# EAGLE board Putri Shaqila_main (EAGLE 9.6.2)
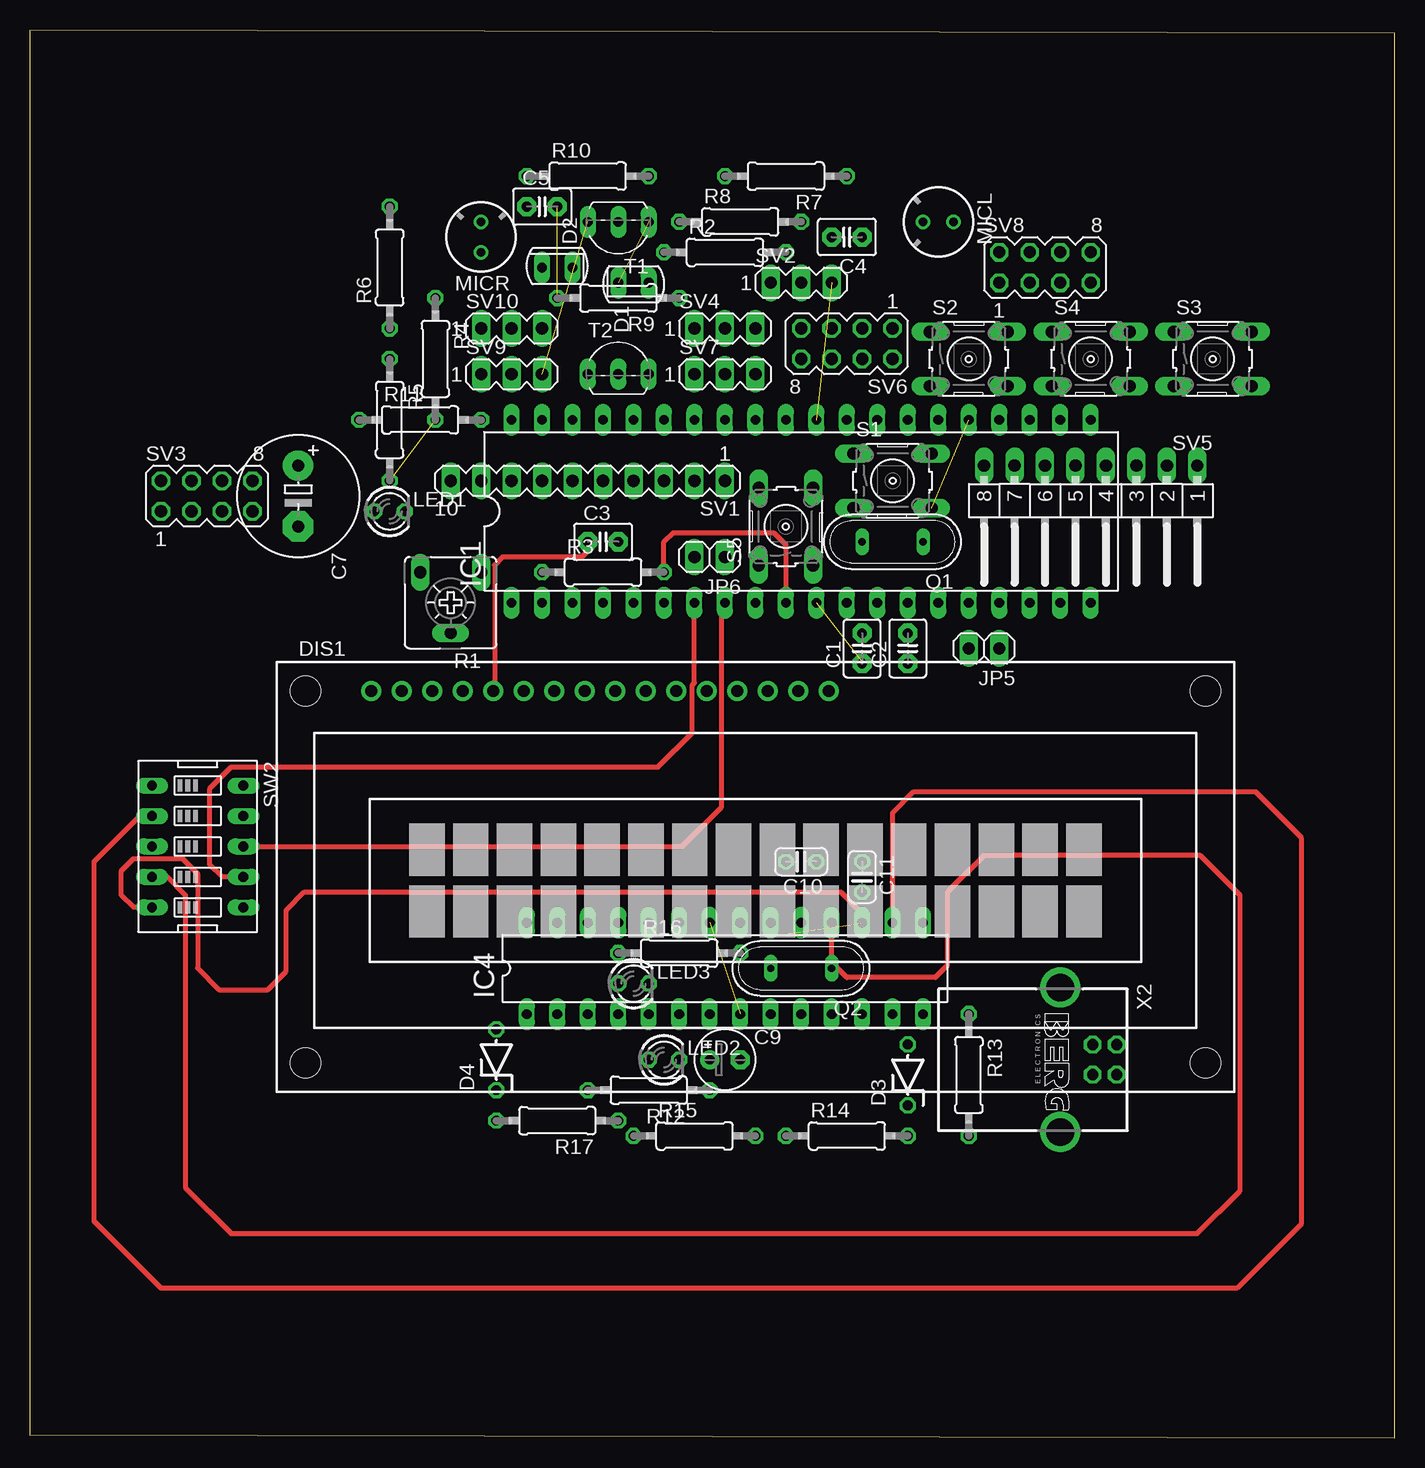
[diagram p0: board, top side]
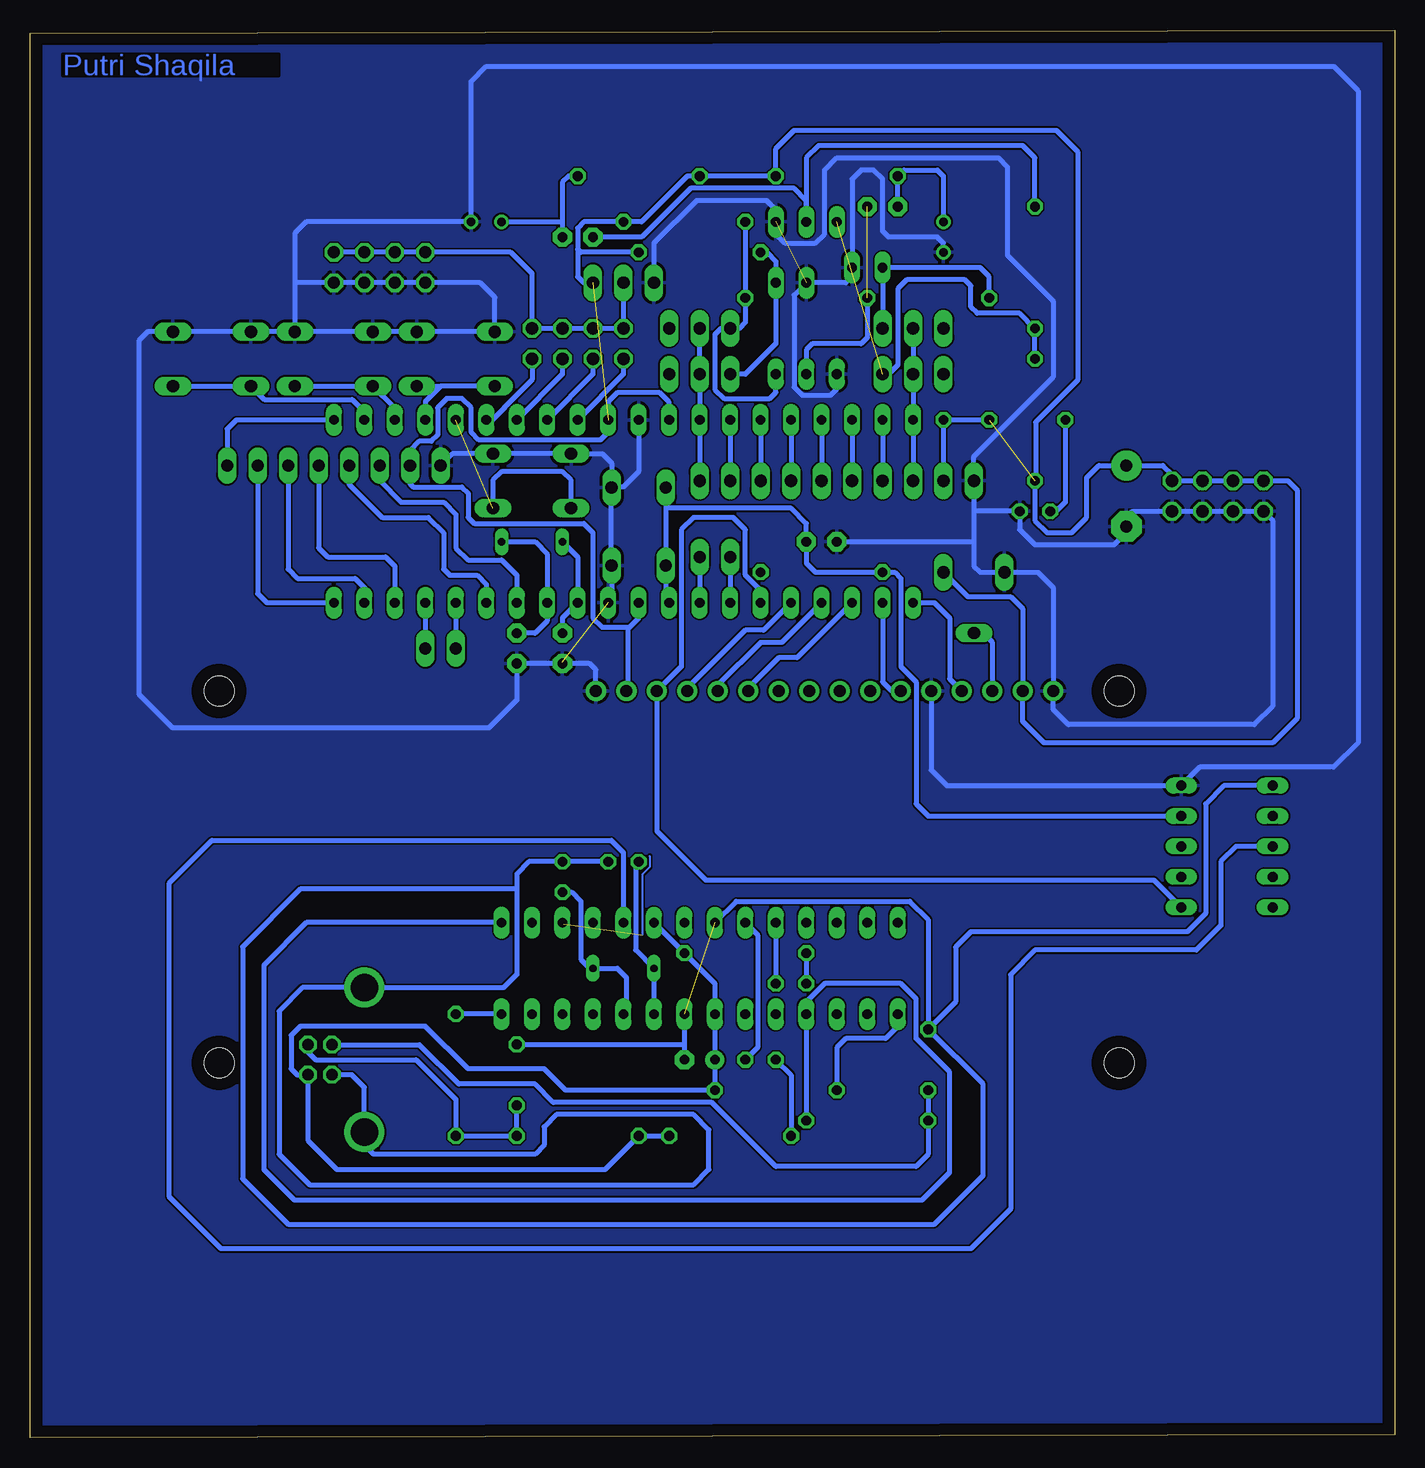
[diagram p1: board, bottom side, seen from below]

Size 113.72 x 117.34 mm. Coordinates in mm from the lower left corner, seen from the top.
Outline: 0,0.25 113.72,0 113.72,117.08 0,117.34 0,0.25
Copper layers (1*16): Top 0.035mm / dielectric 1.5mm / Bottom 0.035mm
Design rules "default": minimum track width 6mil, minimum drill 0.35mm, track to track 6mil, track to pad 6mil, pad to pad 6mil, via to via 6mil, smd to smd 6mil, copper to edge 40mil, drill to drill 6mil, minimum pad ring 10mil, minimum via ring 8mil, stop-mask expansion 4mil, vias tented up to drill 0mil, thermal gap 10mil

## Footprints (pad centres in the part's own frame; a part is rotated, then mirrored left to right if it is on the bottom)
C2.5-3 = drill 0.813 pad 1.6 octagon: 1 -1.27,0; 2 1.27,0
E5-10,5 = drill 1.016 pad 2.54: + -2.54,0 | drill 1.016 pad 2.54 octagon: - 2.54,0
E2,5-5 = drill 0.813 pad 1.6: + -1.27,0 | drill 0.813 pad 1.6 octagon: - 1.27,0
C025-024X044 = drill 0.813 octagon: 1 -1.27,0; 2 1.27,0
SFH225 = drill 0.813 long: A 0,1.27; K 0,-1.27
ZDIO-5 = drill 0.813 octagon: A 2.54,0; C -2.54,0
TUXGR_16X2_R2 = drill 1 pad 1.676: 1 -32,15.5; 2 -29.46,15.5; 3 -26.92,15.5; 4 -24.38,15.5; 5 -21.84,15.5; 6 -19.3,15.5; 7 -16.76,15.5; 8 -14.22,15.5; 9 -11.68,15.5; 10 -9.14,15.5; 11 -6.6,15.5; 12 -4.06,15.5; 13 -1.52,15.5; 14 1.02,15.5; 15 3.56,15.5; 16 6.1,15.5 | hole 2.5: -37.5,-15.5; 37.5,-15.5; -37.5,15.5; 37.5,15.5
DIL40 = drill 0.813 long: 1 -24.13,-7.62; 2 -21.59,-7.62; 3 -19.05,-7.62; 4 -16.51,-7.62; 5 -13.97,-7.62; 6 -11.43,-7.62; 7 -8.89,-7.62; 8 -6.35,-7.62; 9 -3.81,-7.62; 10 -1.27,-7.62; 11 1.27,-7.62; 12 3.81,-7.62; 13 6.35,-7.62; 14 8.89,-7.62; 15 11.43,-7.62; 16 13.97,-7.62; 17 16.51,-7.62; 18 19.05,-7.62; 19 21.59,-7.62; 20 24.13,-7.62; 21 24.13,7.62; 22 21.59,7.62; 23 19.05,7.62; 24 16.51,7.62; 25 13.97,7.62; 26 11.43,7.62; 27 8.89,7.62; 28 6.35,7.62; 29 3.81,7.62; 30 1.27,7.62; 31 -1.27,7.62; 32 -3.81,7.62; 33 -6.35,7.62; 34 -8.89,7.62; 35 -11.43,7.62; 36 -13.97,7.62; 37 -16.51,7.62; 38 -19.05,7.62; 39 -21.59,7.62; 40 -24.13,7.62
DIL28-3 = drill 0.813 long: 1 -16.51,-3.81; 2 -13.97,-3.81; 3 -11.43,-3.81; 4 -8.89,-3.81; 5 -6.35,-3.81; 6 -3.81,-3.81; 7 -1.27,-3.81; 8 1.27,-3.81; 9 3.81,-3.81; 10 6.35,-3.81; 11 8.89,-3.81; 12 11.43,-3.81; 13 13.97,-3.81; 14 16.51,-3.81; 15 16.51,3.81; 16 13.97,3.81; 17 11.43,3.81; 18 8.89,3.81; 19 6.35,3.81; 20 3.81,3.81; 21 1.27,3.81; 22 -1.27,3.81; 23 -3.81,3.81; 24 -6.35,3.81; 25 -8.89,3.81; 26 -11.43,3.81; 27 -13.97,3.81; 28 -16.51,3.81
1X02 = drill 1.016 long: 1 -1.27,0; 2 1.27,0
LED3MM = drill 0.813 octagon: A -1.27,0; K 1.27,0
F6050AP = drill 0.7 pad 1.2: 1 0,1.27; 2 0,-1.27
QS = drill 0.61 long: 1 -2.54,0; 2 2.54,0
CA6V = drill 1.016 long: A -2.54,-2.54; E 2.54,-2.54; S 0,2.54
0207/10 = drill 0.813 octagon: 1 -5.08,0; 2 5.08,0
B3F-10XX = drill 1.016 long: 1 -3.251,2.261; 2 3.251,2.261; 3 -3.251,-2.261; 4 3.251,-2.261
MA10-1 = drill 1.016 long: 1 -11.43,0; 2 -8.89,0; 3 -6.35,0; 4 -3.81,0; 5 -1.27,0; 6 1.27,0; 7 3.81,0; 8 6.35,0; 9 8.89,0; 10 11.43,0
MA03-1 = drill 1.016 long: 1 -2.54,0; 2 0,0; 3 2.54,0
MA04-2 = drill 1.016 octagon: 1 -3.81,-1.27; 2 -3.81,1.27; 3 -1.27,-1.27; 4 -1.27,1.27; 5 1.27,-1.27; 6 1.27,1.27; 7 3.81,-1.27; 8 3.81,1.27
MA08-1W = drill 1.016 long: 1 -8.89,0; 2 -6.35,0; 3 -3.81,0; 4 -1.27,0; 5 1.27,0; 6 3.81,0; 7 6.35,0; 8 8.89,0
EDG-05 = drill 0.813 long: 1 -5.08,-3.81; 2 -2.54,-3.81; 3 0,-3.81; 4 2.54,-3.81; 5 5.08,-3.81; 6 5.08,3.81; 7 2.54,3.81; 8 0,3.81; 9 -2.54,3.81; 10 -5.08,3.81
TO92-EBC = drill 0.813 long: B 0,-1.27; C 2.54,-1.27; E -2.54,-1.27
PN61729-S = drill 0.95 octagon: 1 1.25,4.71; 2 -1.25,4.71; 3 -1.25,2.71; 4 1.25,2.71 | drill 2.3 pad 2.9: S1 -6.02,0; S2 6.02,0

## Placement (x,y rotation side)
C1  22p  [C2.5-3]  69.34,65.79 90 top
C2  22p  [C2.5-3]  73.15,65.79 90 top
C3  10nF  [C2.5-3]  47.75,74.68 0 top
C4  100nF  [C2.5-3]  68.07,100.08 180 top
C5  100nF  [C2.5-3]  42.67,102.62 0 top
C7  1000uF/16V  [E5-10,5]  22.35,78.49 270 top
C9  10uF/16V  [E2,5-5]  57.91,31.5 0 top
C10  22pF  [C025-024X044]  64.26,48.01 180 top
C11  22pF  [C025-024X044]  69.34,46.74 270 top
D1  SFH225  [SFH225]  50.29,96.27 270 top
D2  SFH225  [SFH225]  43.94,97.54 90 top
D3  DZ3,6V  [ZDIO-5]  73.15,30.23 90 top
D4  DZ3,6V  [ZDIO-5]  38.86,31.5 90 top
DIS1  TUXGR_16X2_R2  [TUXGR_16X2_R2]  60.45,46.74 0 top
IC1  MEGA16-P  [DIL40]  64.26,77.22 0 top
IC4  MEGA8-P  [DIL28-3]  57.91,39.12 0 top
JP5  [1X02]  79.5,65.79 180 top
JP6  [1X02]  56.64,73.41 180 top
LED1  merah  [LED3MM]  29.97,77.22 0 top
LED2  Merah  [LED3MM]  52.83,31.5 0 top
LED3  hijau  [LED3MM]  50.29,37.85 0 top
MICL  MC  [F6050AP]  75.69,101.35 270 top
MICR  MC  [F6050AP]  37.59,100.08 180 top
Q1  8MHz  [QS]  71.88,74.68 180 top
Q2  12MHz  [QS]  64.26,39.12 180 top
R1  20K  [CA6V]  35.05,69.6 180 top
R2  56K  [0207/10]  57.91,98.81 0 top
R3  10K  [0207/10]  47.75,72.14 0 top
R4  56K  [0207/10]  33.78,89.92 270 top
R5  10K  [0207/10]  29.97,84.84 270 top
R6  100K  [0207/10]  29.97,97.54 90 top
R7  10K  [0207/10]  62.99,105.16 180 top
R8  10K  [0207/10]  59.18,101.35 0 top
R9  100K  [0207/10]  49.02,95 180 top
R10  10K  [0207/10]  46.48,105.16 0 top
R11  330  [0207/10]  32.51,84.84 0 top
R12  10K  [0207/10]  51.56,28.96 180 top
R13  68  [0207/10]  78.23,30.23 270 top
R14  2K2  [0207/10]  68.07,25.15 0 top
R15  330  [0207/10]  55.37,25.15 0 top
R16  330  [0207/10]  54.1,40.39 0 top
R17  68  [0207/10]  43.94,26.42 180 top
S1  [B3F-10XX]  71.88,79.76 0 top
S2  [B3F-10XX]  78.23,89.92 0 top
S3  [B3F-10XX]  98.55,89.92 0 top
S4  [B3F-10XX]  88.39,89.92 0 top
S5  [B3F-10XX]  62.99,75.95 90 top
SV1  [MA10-1]  46.48,79.76 180 top
SV2  [MA03-1]  64.26,96.27 0 top
SV3  [MA04-2]  14.73,78.49 0 top
SV4  [MA03-1]  57.91,92.46 0 top
SV5  [MA08-1W]  88.39,81.03 180 top
SV6  [MA04-2]  68.07,91.19 180 top
SV7  [MA03-1]  57.91,88.65 0 top
SV8  [MA04-2]  84.58,97.54 0 top
SV9  [MA03-1]  40.13,88.65 0 top
SV10  [MA03-1]  40.13,92.46 0 top
SW2  [EDG-05]  13.97,49.28 270 top
T1  [TO92-EBC]  49.02,100.08 180 top
T2  [TO92-EBC]  49.02,89.92 0 top
X2  PN61729-S  [PN61729-S]  85.85,31.5 270 top

## Library data of the parts
C1-C5 = capacitor-wima
C7 C9-C11 R2-R11 = rcl
D1 D2 = opto-trans-siemens; OC_FARNELL: unknown; OC_NEWARK: unknown
D3 D4 = diode
DIS1 = display-lcd; OC_FARNELL: unknown; OC_NEWARK: unknown
IC1 = atmel; MPN: ATMEGA16-16PU; OC_FARNELL: 9171142; OC_NEWARK: 01M6885
IC4 = atmel
JP5 JP6 = pinhead
LED1-LED3 = led
MICL MICR = microphon
Q1 Q2 SW2 = special
R1 = pot
R12-R17 = resistor
S1-S5 = switch-omron; MPN: B3F-1000; OC_FARNELL: 176432; OC_NEWARK: 36M3542
SV1-SV10 = con-lstb; OC_FARNELL: unknown; OC_NEWARK: unknown
T1 T2 = transistor
X2 = con-berg

## Nets
DGND: C9.- C10.1 C11.1 D3.A D4.A IC4.8 IC4.22 SW2.1 X2.4 X2.S1 X2.S2
GND: C1.1 C2.1 C3.1 C7.- D1.K D2.K DIS1.1 DIS1.5 DIS1.16 IC1.11 IC1.31 LED1.K MICL.1 MICR.1 R1.E S1.1 S1.2 S2.1 S2.2 S3.1 S3.2 S4.1 S4.2 S5.3 S5.4 SV1.10 SV2.1 SV3.1 SV3.3 SV3.5 SV3.7 SV5.8 SV8.1 SV8.3 SV8.5 SV8.7 SW2.10 T1.E T2.E
MISO: IC1.7 JP6.2 SW2.7
MOSI: DIS1.14 IC1.6 SW2.6
N$1: IC1.33 SV1.1 SV4.2 SV7.2
N$2: IC1.34 SV1.2
N$3: IC1.35 SV1.3
N$4: IC1.36 SV1.4
N$5: IC1.37 SV1.5
N$6: IC1.38 SV1.6
N$7: IC1.39 SV1.7
N$8: D2.A R4.1 SV10.3
N$9: IC1.24 S2.3 S2.4
N$10: DIS1.13 IC1.5
N$11: DIS1.12 IC1.4
N$12: DIS1.11 IC1.3
N$13: DIS1.6 IC1.2
N$14: R5.1 R6.1 SV9.3 T1.C
N$15: DIS1.3 R1.S
N$16: C1.2 IC1.12 Q1.2
N$17: C2.2 IC1.13 Q1.1
N$18: DIS1.4 IC1.1
N$19: D1.A R2.1 SV7.1
N$20: IC1.23 S4.3 S4.4
N$21: IC1.40 SV1.8 SV9.2 SV10.2
N$22: C4.2 R6.2 T1.B
N$23: C4.1 MICL.2 R7.1
N$24: R8.1 R9.1 SV4.1 T2.C
N$25: C5.2 R9.2 T2.B
N$26: C5.1 MICR.2 R10.1
N$27: IC1.22 S3.3 S3.4
N$28: IC1.25 S1.3 S1.4
N$30: IC1.21 SV5.1
N$32: IC1.20 SV5.2
N$33: IC1.19 SV5.3
N$34: IC1.18 SV5.4
N$35: IC1.15 SV5.5
N$36: IC1.14 SV5.6
N$37: IC1.16 JP5.2
N$38: IC1.17 JP5.1
N$41: LED1.A R11.1
N$42: IC4.1 R12.2
N$44: IC1.26 SV6.2
N$45: IC1.27 SV6.4
N$46: IC1.28 SV6.6
N$47: IC1.29 SV6.8
N$51: C10.2 IC4.9 Q2.2
N$52: C11.2 IC4.10 Q2.1
N$53: IC4.14 R13.1
N$55: LED2.A R15.1
N$56: LED3.A R16.1
N$57: IC4.23 LED2.K
N$58: IC4.24 LED3.K
N$59: D4.C R17.2 X2.3
N$67: IC4.4 IC4.15 R17.1
N$69: D3.C R13.2 R14.2 X2.2
N$175: IC4.17 SW2.5
N$176: IC4.18 SW2.4
N$177: IC4.19 SW2.3
N$178: IC4.16 SW2.2
RESET: C3.2 IC1.9 R3.1 S5.1 S5.2 SW2.9
SCK: IC1.8 JP6.1 SW2.8
VCC: C7.+ DIS1.2 DIS1.15 IC1.10 IC1.30 IC1.32 R1.A R2.2 R3.2 R4.2 R5.2 R7.2 R8.2 R10.2 R11.2 SV1.9 SV2.3 SV3.2 SV3.4 SV3.6 SV3.8 SV5.7
VDD: SV2.2 SV6.1 SV6.3 SV6.5 SV6.7 SV8.2 SV8.4 SV8.6 SV8.8
VPP: C9.+ IC4.7 IC4.20 R12.1 R14.1 R15.2 R16.2 X2.1

## Tracks (layer width: path | path; a pad name or v marks a point on that pad's centre or on a via)
DGND  (1 unrouted)
  Bottom 0.152: 85.85,37.49 X2.S1
  Bottom 0.406: IC4.8 59.18,32.77 | 59.18,32.77 C9.- | D3.A 59.18,32.77 | IC4.22 54.86,44.7 40.39,44.7 38.86,43.18 D4.A | SW2.1 14.22,54.36 15.75,52.83 15.75,43.69 17.27,42.16 35.31,42.16 36.58,40.89 36.58,36.32 D4.A | C10.1 C11.1 72.14,48.01 73.15,46.99 73.15,45.72 | 73.15,45.72 73.15,38.61 74.27,37.49 85.85,37.49 | X2.S1 91.01,37.52 92.96,35.56 92.96,23.62 90.42,21.08 58.42,21.08 57.15,22.35 57.15,25.65 58.42,26.92 69.85,26.92 70.87,25.91 70.87,24.38 71.63,23.62 85.09,23.62 85.85,24.38 X2.S2 85.85,29.21 86.89,30.25 X2.4 | 73.15,45.72 91.19,45.72 95.99,40.91 95.99,21.57 92.2,17.78 38.35,17.78 34.29,21.84 34.29,29.46 D4.A
GND  (2 unrouted)
  Top 0.406: C3.1 46.48,73.91 45.97,73.41 39.37,73.41 38.71,72.75 38.71,62.33 DIS1.5
  Bottom 0.152: 65.28,72.69 65.3,72.67 65.43,72.54 | 65.28,72.69 S5.3 | 73.05,64.62 C2.1 73.2,64.62 | 69.39,64.62 C1.1 69.24,64.47 | S1.1 68.66,82.04 | 65.25,72.72 65.28,72.69 | S5.4 65.25,79.25 | 17.73,54.41 SW2.10
  Bottom 0.406: 91.64,96.27 91.64,100.38 90.68,101.35 MICL.1 76.96,113.03 75.69,114.3 5.08,114.3 3.05,112.27 3.05,57.91 5.08,55.88 16.26,55.88 17.73,54.41 | 91.64,96.27 S4.2 | S4.2 S3.1 S3.2 103.91,92.18 104.65,91.44 104.65,61.98 101.85,59.18 75.44,59.18 73.15,61.47 C2.1 C1.1 | 91.64,96.27 SV8.7 SV8.5 SV8.3 SV8.1 76.2,96.27 74.98,95.05 S2.1 S2.2 S4.1 S4.2 | SV2.1 61.72,99.57 58.17,103.12 52.32,103.12 51.56,102.36 T1.E 51.56,100.33 50.8,99.57 48.26,99.57 47.5,100.33 47.5,105.66 46.48,106.68 33.02,106.68 32.26,105.92 32.26,98.55 28.45,94.74 28.45,88.39 35.05,81.79 SV1.10 35.05,77.22 | MICR.1 37.59,99.57 38.1,100.08 42.16,100.08 42.67,100.58 42.67,104.9 43.43,105.66 44.45,105.66 45.21,104.9 D2.K 45.21,96.77 45.72,96.27 D1.K 50.04,95.25 50.04,87.56 49.37,86.89 46.99,86.89 46.48,87.4 T2.E | 35.05,77.22 LED1.K 31.24,75.69 29.97,74.42 23.37,74.42 22.35,75.44 C7.- 22.35,76.71 21.84,77.22 SV3.7 SV3.5 SV3.3 SV3.1 10.16,76.45 10.16,60.96 11.68,59.44 27.18,59.44 28.45,60.71 DIS1.1 28.45,70.87 29.72,72.14 R1.E 34.54,72.14 35.05,72.64 35.05,74.68 | 35.05,77.22 35.05,74.68 | C3.1 35.05,74.68 | IC1.31 62.99,80.52 64.26,79.25 65.25,79.25 65.25,81.25 66.02,82.02 S1.1 S1.2 78.51,82.02 SV5.8 | S5.4 65.3,79.15 65.3,72.67 | S5.3 65.25,69.88 IC1.11 | DIS1.16 66.55,64.01 67.06,64.52 69.19,64.52 69.24,64.47 | DIS1.5 38.61,55.63 37.34,54.36 SW2.10
  pour Bottom: 0,117.35 0,0 113.79,0 113.79,117.35
MISO
  Top 0.406: SW2.7 16,46.74 14.99,47.75 14.99,54.1 16.76,55.88 52.32,55.88 55.2,58.75 55.2,62.73 55.37,62.9 IC1.7
  Bottom 0.406: JP6.2 IC1.7
MOSI
  Bottom 0.406: IC1.6 52.83,70.61 54.1,71.88 54.1,75.69 55.12,76.71 58.42,76.71 59.44,75.69 59.44,64.27 DIS1.14 61.47,50.55 57.4,46.48 20.07,46.48 SW2.6
N$1
  Bottom 0.152: 57.96,84.89 IC1.33 57.96,84.73 | 57.96,88.54 SV7.2 57.96,88.7
  Bottom 0.406: SV4.2 57.96,92.41 57.96,88.7 | SV7.2 IC1.33 SV1.1
N$2
  Bottom 0.406: IC1.34 SV1.2
N$3
  Bottom 0.406: IC1.35 SV1.3
N$4
  Bottom 0.406: IC1.36 SV1.4
N$5
  Bottom 0.406: IC1.37 SV1.5
N$6
  Bottom 0.406: IC1.38 SV1.6
N$7
  Bottom 0.406: IC1.39 SV1.7
N$8
  Bottom 0.406: R4.1 33.78,96.77 34.54,97.54 D2.A SV10.3
N$9
  Bottom 0.406: S2.3 79.48,87.66 | IC1.24 80.77,86.36 79.48,87.66 | S2.4 79.48,87.66
N$10
  Bottom 0.406: IC1.5 52.58,67.31 54.1,67.31 58.93,62.48 DIS1.13
N$11
  Bottom 0.406: IC1.4 51.05,66.29 52.83,66.29 56.39,62.73 DIS1.12
N$12
  Bottom 0.406: IC1.3 49.78,65.02 51.31,65.02 53.85,62.48 DIS1.11
N$13
  Bottom 0.406: IC1.2 42.67,62.99 41.92,62.24 DIS1.6
N$14  (1 unrouted)
  Bottom 0.152: 30.07,92.35 R6.1
  Bottom 0.406: R5.1 R6.1 31.24,93.73 34.8,93.73 35.31,94.23 35.31,96.01 35.81,96.52 40.64,96.52 41.4,95.76 41.4,89.41 42.16,88.65 SV9.3
N$15
  Bottom 0.406: R1.S 34.29,67.06 33.53,66.3 DIS1.3
N$16
  Bottom 0.152: 68.17,69.65 IC1.12
  Bottom 0.406: Q1.2 68.07,73.41 IC1.12 69.34,68.33 C1.2
N$17
  Bottom 0.152: 70.61,69.65 IC1.13 70.61,69.49 | 73.05,67.06 C2.2
  Bottom 0.406: Q1.1 71.63,74.68 70.61,73.66 70.61,69.49 | IC1.13 70.61,68.07 71.63,67.06 C2.2
N$18
  Bottom 0.406: IC1.1 38.35,69.6 37.08,68.33 37.08,63.25 DIS1.4
N$19
  Bottom 0.406: R2.1 52.32,98.81 51.56,98.04 D1.A 51.56,91.19 54.1,88.65 SV7.1
N$20
  Bottom 0.152: 83.41,84.89 IC1.23
  Bottom 0.406: S4.4 S4.3 83.41,85.93 83.41,84.89
N$21
  Bottom 0.406: SV10.2 SV9.2 IC1.40 SV1.8
N$22
  Bottom 0.152: 66.8,100.13 C4.2
  Bottom 0.406: 66.8,100.13 66.75,100.08 62.74,100.08 58.67,104.14 50.04,104.14 49.02,103.12 T1.B 49.02,106.68 48.01,107.7 30.99,107.7 29.97,106.68 R6.2
N$23
  Bottom 0.406: R7.1 68.83,105.16 69.34,104.65 69.34,101.35 | 69.34,101.35 C4.1 | MICL.2 69.34,101.35
N$24
  Bottom 0.152: 51.56,88.54 T2.C
  Bottom 0.406: R8.1 R9.1 54.1,92.96 54.61,92.46 SV4.1 56.13,92.46 56.64,91.95 56.64,87.38 55.88,86.61 52.07,86.61 51.56,87.12 51.56,88.54
N$25  (1 unrouted)
  Bottom 0.406: R9.2 43.94,91.69 44.45,91.19 48.51,91.19 49.02,90.68 T2.B
N$26
  Bottom 0.406: C5.1 R10.1 40.89,105.66 38.1,105.66 37.59,105.16 MICR.2
N$27
  Bottom 0.406: S3.4 S3.3 94.18,86.54 86.87,86.54 85.85,85.52 IC1.22
N$28  (1 unrouted)
  Bottom 0.406: S1.3 68.63,79.81 69.34,80.52 74.42,80.52 75.13,79.81 S1.4
N$30
  Bottom 0.406: IC1.21 96.52,84.84 97.28,84.07 SV5.1
N$32
  Bottom 0.406: SV5.2 94.74,70.36 93.98,69.6 IC1.20
N$33
  Bottom 0.406: SV5.3 92.2,72.39 91.44,71.63 86.61,71.63 85.85,70.87 IC1.19
N$34
  Bottom 0.406: SV5.4 89.66,74.17 88.9,73.41 84.07,73.41 83.31,72.64 IC1.18
N$35
  Bottom 0.406: IC1.15 75.69,71.12 76.45,71.88 78.74,71.88 79.25,72.39 79.25,75.44 80.52,76.71 84.38,76.71 87.12,79.45 SV5.5
N$36
  Bottom 0.406: SV5.6 84.58,79.76 82.8,77.98 79.25,77.98 78.23,76.96 78.23,74.17 77.22,73.15 74.42,73.15 73.15,71.88 IC1.14
N$37
  Bottom 0.406: IC1.16 JP5.2
N$38
  Bottom 0.152: 80.82,69.49 IC1.17 | 80.82,65.84 JP5.1
  Bottom 0.406: IC1.17 JP5.1
N$41
  Bottom 0.406: R11.1 27.43,77.98 28.19,77.22 LED1.A
N$42
  Bottom 0.406: IC4.1 41.4,34.29 42.42,33.27 45.72,33.27 46.48,32.51 R12.2
N$44
  Bottom 0.406: SV6.2 71.88,88.2 74.17,85.92 74.17,85.85 75.18,84.84 IC1.26
N$45
  Bottom 0.406: SV6.4 69.34,88.65 IC1.27
N$46
  Bottom 0.406: SV6.6 66.8,88.65 IC1.28
N$47
  Bottom 0.406: SV6.8 64.26,88.65 IC1.29
N$51
  Bottom 0.406: C10.2 63.25,47.75 63.25,40.64 Q2.2 IC4.9
N$52
  Bottom 0.152: 67.26,39.12 67.06,39.12 Q2.1
  Bottom 0.406: C11.2 68.58,45.47 67.82,44.7 67.82,39.88 67.06,39.12 | IC4.10 64.01,35.56 64.01,38.35 64.77,39.12 Q2.1
N$53
  Bottom 0.406: IC4.14 R13.1
N$55
  Bottom 0.152: 50.34,25.15 R15.1
  Bottom 0.406: LED2.A 50.29,30.23 R15.1
N$56
  Bottom 0.406: R16.1 LED3.A
N$57
  Bottom 0.406: IC4.23 53.09,41.91 53.09,32.51 LED2.K
N$58
  Bottom 0.406: IC4.24 LED3.K
N$59
  Bottom 0.406: D4.C R17.2 38.86,23.62 39.88,22.61 51.56,22.61 56.9,27.94 70.1,27.94 71.63,29.46 77.98,29.46 81.26,32.75 X2.3
N$67
  Bottom 0.152: 49.12,26.52 R17.1
  Bottom 0.406: R17.1 IC4.4 49.02,36.32 47.5,37.85 41.15,37.85 39.88,36.58 39.88,33.27 37.08,30.48 37.08,22.1 39.37,19.81 91.69,19.81 94.23,22.35 94.23,39.37 90.68,42.93 IC4.15
N$69
  Bottom 0.406: X2.2 90.56,32.14 89.92,31.5 81.53,31.5 78.23,28.19 R13.2 R14.2 D3.C
N$175  (1 unrouted)
  Top 0.406: SW2.5 8.64,44.2 7.62,45.21 7.62,47.24 8.64,48.26 12.7,48.26 13.97,46.99 13.97,39.12 15.75,37.34 19.81,37.34 21.34,38.86 21.34,43.94 22.86,45.47 67.56,45.47 69.34,43.69 IC4.17
  Bottom 0.152: 62.69,41.91 62.69,46.94 62.08,47.55 62.08,48.46 | 69.24,42.82 IC4.17
N$176
  Top 0.406: SW2.4 11.43,46.74 12.95,45.21 12.95,20.83 16.76,17.02 97.28,17.02 100.84,20.57 100.84,45.21 97.54,48.51 79.5,48.51 76.45,45.47 76.45,39.37 75.44,38.35 68.07,38.35 66.8,39.62 IC4.18
N$177
  Bottom 0.152: 64.36,42.98 IC4.19
  Bottom 0.406: SW2.3 13.21,49.28 14.48,48.01 14.48,42.67 16.51,40.64 29.97,40.64 32,38.61 32,19.05 35.31,15.75 86.11,15.75 97.79,15.75 102.11,20.07 102.11,46.23 98.55,49.78 65.28,49.78 64.26,48.77 IC4.19
N$178
  Top 0.406: IC4.16 71.88,52.07 73.66,53.85 102.11,53.85 105.92,50.04 105.92,17.78 100.58,12.45 10.92,12.45 5.33,18.03 5.33,48.01 9.14,51.82 SW2.2
RESET
  Bottom 0.152: 42.57,72.09 R3.1 42.72,72.24
  Bottom 0.406: S5.2 60.73,77.47 | 60.73,77.47 S5.1 60.73,69.88 IC1.9 | 60.73,77.47 50.29,77.47 49.02,76.2 C3.2 49.02,72.9 48.26,72.14 R3.1 41.66,72.14 41.15,71.63 41.15,64.26 39.88,62.99 39.88,52.83 38.86,51.82 SW2.9
SCK
  Top 0.406: SW2.8 54.36,49.28 57.59,52.51 57.59,69.27 IC1.8
  Bottom 0.152: 57.96,69.65 IC1.8
  Bottom 0.406: JP6.1 IC1.8
VCC  (2 unrouted)
  Top 0.406: R3.2 52.83,74.68 53.59,75.44 61.98,75.44 62.99,74.42 IC1.10
  Bottom 0.152: 63.91,62.33 DIS1.15 | 82.04,80.92 SV5.7 | 29.92,79.86 R5.2
  Bottom 0.406: 68.07,99.06 68.07,100.84 67.56,101.35 R8.2 62.74,101.35 58.93,105.16 R7.2 R10.2 51.56,107.44 50.04,108.97 28.19,108.97 26.42,107.19 26.42,88.14 29.92,84.63 29.92,79.86 | 68.07,99.06 68.07,96.77 67.56,96.27 SV2.3 | R2.2 67.82,98.81 68.07,99.06 | R1.A 35.56,70.1 32,70.1 30.99,69.09 DIS1.2 30.99,59.69 29.21,57.91 10.16,57.91 8.13,59.94 8.13,78.99 8.89,79.76 SV3.2 SV3.4 SV3.6 SV3.8 18.54,80.26 19.3,81.03 C7.+ 24.64,81.03 25.65,80.01 25.65,76.71 26.92,75.44 28.96,75.44 29.97,76.45 R5.2 | R4.2 R11.2 SV1.9 | IC1.32 60.45,86.3 61.24,87.09 64.8,87.09 65.53,86.36 IC1.30 65.53,83.82 66.19,83.16 76.3,83.16 76.96,83.82 76.96,85.85 77.72,86.61 78.99,86.61 79.76,85.85 79.76,83.57 80.26,83.06 81.28,83.06 82.04,82.3 SV5.7 82.04,79.5 81.79,79.25 77.72,79.25 77.22,78.74 77.22,76.71 76.71,76.2 67.56,76.2 66.8,75.44 66.8,68.33 66.04,67.56 63.75,67.56 | 63.75,67.56 62.99,68.33 IC1.10 | 63.75,67.56 63.91,67.41 63.91,62.33
VDD
  Bottom 0.152: 69.39,92.51 SV6.3 69.24,92.51 | 71.83,92.51 SV6.1
  Bottom 0.406: SV8.8 SV8.6 SV8.4 SV8.2 73.66,98.81 71.88,97.03 SV6.1 SV6.3 SV6.5 SV6.7 SV2.2
VPP
  Bottom 0.152: 56.74,35.2 IC4.7 56.74,35.36 | 90.42,30.18 X2.1 | 90.58,30.33 X2.1 | X2.1
  Bottom 0.406: IC4.20 R16.2 56.64,37.85 IC4.7 C9.+ R12.1 69.09,28.96 70.87,30.73 77.22,30.73 80.77,34.29 91.19,34.29 91.95,33.53 91.95,30.73 91.44,30.23 90.58,30.23 X2.1 90.56,24.78 88.14,22.35 65.79,22.35 R14.1 R15.2

## Text on the board
Bottom: Putri Shaqila